# Altium PCB powerhub.PcbDoc (part 2 of 2)
Units mil, origin at the board's own origin, x right, y up, seen from the top; angles counter-clockwise.
Board outline 2155 x 2355 mil, 2 copper layers (Top Layer, Bottom Layer); 40 components, 18 nets, 144 pads, 26 vias.
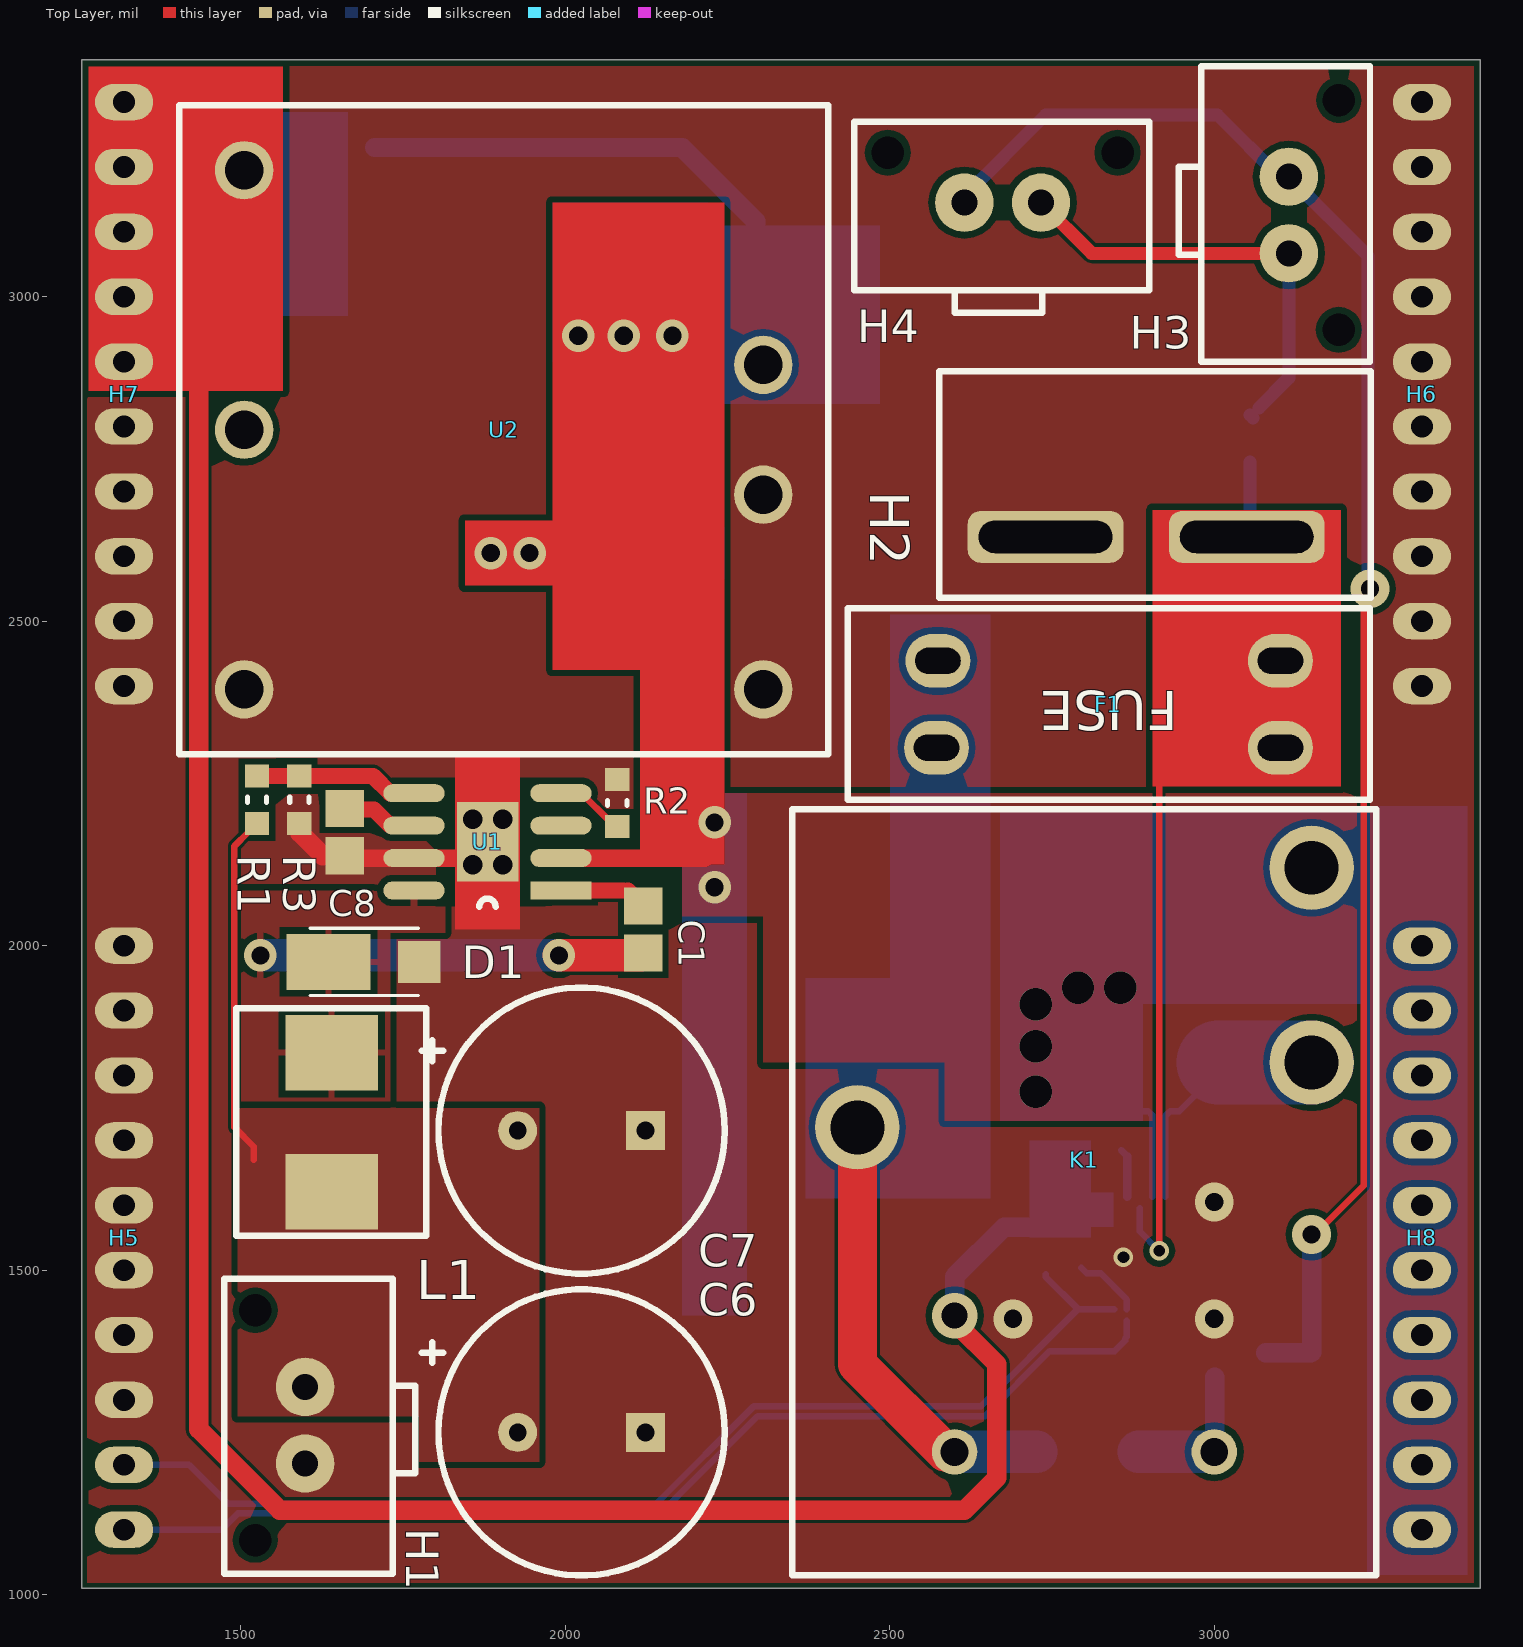
[diagram p0: Top Layer view]

## Part data (continued)
R3: "Resistor", Case/Package=0603, Case Code (Metric)=1608, Manufacturer=Vishay, Manufacturer Part Number=CRCW06034K30FKEA, Max Operating Temperature=155°C, Max Power Dissipation=100mW, Min Operating Temperature=-55°C, Package Quantity=10, Resistance=4.3K, Supplier Part Number 1=541-4.30KHCT-ND, Temperature Coefficient=100ppm/°C, Tolerance=1%, Voltage Rating=75V, Case Code (Imperial)=0603, ComponentLink1Description=https://datasheet.ciiva.com/11810/0900766b80d98afc-11810931.pdf?src-supplier=RSComponents, ComponentLink1URL=https://datasheet.ciiva.com/11810/0900766b80d98afc-11810931.pdf?src-supplier=RSComponents, ComponentLink2Description=https://datasheet.ciiva.com/2494/dcrcwe3-2494597.pdf?src-supplier=Digi-Key, ComponentLink2URL=https://datasheet.ciiva.com/2494/dcrcwe3-2494597.pdf?src-supplier=Digi-Key, ComponentLink3Description=https://datasheet.ciiva.com/9073/dcrcwe3-9073925.pdf?src-supplier=Avnet, ComponentLink3URL=https://datasheet.ciiva.com/9073/dcrcwe3-9073925.pdf?src-supplier=Avnet, ComponentLink4Description=https://datasheet.ciiva.com/16430/dcrcwe3-16430149.pdf?src-supplier=Future+Electronics, ComponentLink4URL=https://datasheet.ciiva.com/16430/dcrcwe3-16430149.pdf?src-supplier=Future+Electronics, ComponentLink5Description=https://datasheet.ciiva.com/2494/dcrcwe3-2494598.pdf?src-supplier=Digi-Key, ComponentLink5URL=https://datasheet.ciiva.com/2494/dcrcwe3-2494598.pdf?src-supplier=Digi-Key, ComponentLink6Description=https://datasheet.ciiva.com/16762/70201119-16762678.pdf?src-supplier=Allied+Electronics, ComponentLink6URL=https://datasheet.ciiva.com/16762/70201119-16762678.pdf?src-supplier=Allied+Electronics, ComponentLink7Description=https://datasheet.ciiva.com/22674/1700796-22674598.pdf?src-supplier=Element14, ComponentLink7URL=https://datasheet.ciiva.com/22674/1700796-22674598.pdf?src-supplier=Element14, ComponentLink8Description=https://datasheet.ciiva.com/22707/1697337-22707750.pdf?src-supplier=Element14, ComponentLink8URL=https://datasheet.ciiva.com/22707/1697337-22707750.pdf?src-supplier=Element14, ComponentLink9Description=https://datasheet.ciiva.com/2494/dcrcwe3-2494599.pdf?src-supplier=Digi-Key, ComponentLink9URL=https://datasheet.ciiva.com/2494/dcrcwe3-2494599.pdf?src-supplier=Digi-Key, ComponentLink10Description=https://datasheet.ciiva.com/5544/dcrcwe3-109170-5544359.pdf?src-supplier=Mouser, ComponentLink10URL=https://datasheet.ciiva.com/5544/dcrcwe3-109170-5544359.pdf?src-supplier=Mouser, ComponentLink11Description=https://datasheet.ciiva.com/22871/70201119-22871607.pdf?src-supplier=Allied+Electronics, ComponentLink11URL=https://datasheet.ciiva.com/22871/70201119-22871607.pdf?src-supplier=Allied+Electronics, ComponentLink12Description=https://datasheet.ciiva.com/7679/1697337-7679113.pdf?src-supplier=Element14, ComponentLink12URL=https://datasheet.ciiva.com/7679/1697337-7679113.pdf?src-supplier=Element14, ComponentLink13Description=https://datasheet.ciiva.com/3257/dcrcwe3-3257658.pdf?src-supplier=Avnet, ComponentLink13URL=https://datasheet.ciiva.com/3257/dcrcwe3-3257658.pdf?src-supplier=Avnet, ComponentLink14Description=https://datasheet.ciiva.com/7679/1697337-7679114.pdf?src-supplier=Element14, ComponentLink14URL=https://datasheet.ciiva.com/7679/1697337-7679114.pdf?src-supplier=Element14, ComponentLink15Description=https://datasheet.ciiva.com/26314/fld-crcw-e3-data-en-26314730.pdf?src-supplier=Distrelec, ComponentLink15URL=https://datasheet.ciiva.com/26314/fld-crcw-e3-data-en-26314730.pdf?src-supplier=Distrelec, ComponentLink16Description=https://datasheet.ciiva.com/7792/1700796-7792302.pdf?src-supplier=Element14, ComponentLink16URL=https://datasheet.ciiva.com/7792/1700796-7792302.pdf?src-supplier=Element14, Composition="Thick Film", Contact Plating=Tin, Depth=0.85mm, Features="Automotive AEC-Q200", Height=0.45mm, Lead Free="Lead Free", Length=1.55mm, Military Standard=Not, Mount="Surface Mount", Number of Pins=2, Number of Terminations=2, Packaging="Tape and Reel", Power Rating=100mW, Pricing 1="1=0.10000, 10=0.03400, 100=0.01390, 1000=0.00623, 2500=0.00540 (USD)", Radiation Hardening=No, REACH SVHC=Unknown, RoHS=Yes, Stock 1=18560, Supplier 1=Digi-Key, Termination=SMD/SMT, Voltage Rating (DC)=75V, Weight=7.1E-05oz, Width=0.033inch
R4: library part Res1, "RSENSE", Case/Package=2512, Case Code (Metric)=6432, Manufacturer=Bourns, Manufacturer Part Number=CRE2512-FZ-R001E-3, Max Operating Temperature=170°C, Max Power Dissipation=3W, Min Operating Temperature=-55°C, Resistance=1mR, Supplier Part Number 1=CRE2512-FZ-R001E-3CT-ND, Temperature Coefficient=75ppm/°C, Tolerance=1%, Case Code (Imperial)=2512, ComponentLink1Description=http://www.alliedelec.com/images/products/datasheets/bm/BOURNS/70418754.pdf?src-supplier=Allied+Electronics, ComponentLink1URL=http://www.alliedelec.com/images/products/datasheets/bm/BOURNS/70418754.pdf?src-supplier=Allied+Electronics, ComponentLink2Description=http://www.farnell.com/datasheets/2059712.pdf?src-supplier=Farnell, ComponentLink2URL=http://www.farnell.com/datasheets/2059712.pdf?src-supplier=Farnell, ComponentLink3Description=http://www.mouser.com/ds/2/54/Bourns_CRE_datasheet-369388.pdf?src-supplier=Mouser, ComponentLink3URL=http://www.mouser.com/ds/2/54/Bourns_CRE_datasheet-369388.pdf?src-supplier=Mouser, ComponentLink4Description=http://www.farnell.com/datasheets/1838634.pdf?src-supplier=Element14, ComponentLink4URL=http://www.farnell.com/datasheets/1838634.pdf?src-supplier=Element14, ComponentLink5Description=http://www.bourns.com/data/global/pdfs/CRE.pdf?src-supplier=Avnet, ComponentLink5URL=http://www.bourns.com/data/global/pdfs/CRE.pdf?src-supplier=Avnet, ComponentLink6Description=https://www.bourns.com/docs/technical-documents/featured-product-bulletins/Bourns_N1403_CRE_FPB.pdf?src-supplier=Digi-Key, ComponentLink6URL=https://www.bourns.com/docs/technical-documents/featured-product-bulletins/Bourns_N1403_CRE_FPB.pdf?src-supplier=Digi-Key, ComponentLink7Description=http://www.bourns.com/docs/Product-Datasheets/CRE.pdf?src-supplier=Digi-Key, ComponentLink7URL=http://www.bourns.com/docs/Product-Datasheets/CRE.pdf?src-supplier=Digi-Key, Composition="Metal Film,Thick Film,Metal Alloy", Contact Plating=Tin, Depth=3.35mm, Features="Moisture Resistant,Automotive AEC-Q200", Height=0.035inch, Length=6.45mm, Mount="Surface Mount", Number of Terminations=2, Packaging="Cut Tape", Power Rating=3W, Pricing 1="1=0.77000, 10=0.66800, 25=0.58680, 50=0.53640, 100=0.46550, 250=0.40480, 500=0.33598, 1000=0.27526 (USD)", REACH SVHC="No SVHC", RoHS=Yes, Stock 1=17279, Supplier 1=Digi-Key, Termination=Wraparound, Width=0.132inch
R5: library part "RES 0603", "RES 0603", Manufacturer="TE Connectivity", Manufacturer Part Number=CRGCQ0603J470K, Supplier Part Number 1=A130107CT-ND, ComponentLink1Description=https://4donline.ihs.com/images/VipMasterIC/IC/TYEL/TYEL-S-A0004929575/TYEL-S-A0004929575-1.pdf?hkey=52A5661711E402568146F3353EA87419&src-supplier=Farnell, ComponentLink1URL=https://4donline.ihs.com/images/VipMasterIC/IC/TYEL/TYEL-S-A0004929575/TYEL-S-A0004929575-1.pdf?hkey=52A5661711E402568146F3353EA87419&src-supplier=Farnell, ComponentLink2Description=https://4donline.ihs.com/images/VipMasterIC/IC/TYEL/TYEL-S-A0004929575/TYEL-S-A0004929575-1.pdf?hkey=52A5661711E402568146F3353EA87419&src-supplier=Newark, ComponentLink2URL=https://4donline.ihs.com/images/VipMasterIC/IC/TYEL/TYEL-S-A0004929575/TYEL-S-A0004929575-1.pdf?hkey=52A5661711E402568146F3353EA87419&src-supplier=Newark, Pricing 1="1=0.10000, 10=0.02100, 100=0.00860, 1000=0.00387, 2500=0.00336 (USD)", RoHS=No, Stock 1=79000, Supplier 1=Digi-Key
R6 R7: "Resistor", Case/Package=0603, Case Code (Metric)=1608, Manufacturer="TE Connectivity", Manufacturer Part Number=CRGH0603J4K7, Max Operating Temperature=125°C, Min Operating Temperature=-55°C, Number of Resistors=1, Power Rating=200mW, Resistance=4.7kR, Supplier Part Number 1=A126410CT-ND, Temperature Coefficient=100ppm/°C, Tolerance=5%, Voltage Rating=50V, Case Code (Imperial)=0603, ComponentLink1Description=https://datasheet.ciiva.com/28588/1755795-28588122.pdf?src-supplier=Element14, ComponentLink1URL=https://datasheet.ciiva.com/28588/1755795-28588122.pdf?src-supplier=Element14, Composition="Thick Film,Power resistor", Depth=0.8mm, ELV=Compliant, Height=0.45mm, Length=1.6mm, Mount="Surface Mount", Number of Terminations=2, Packaging="Tape and Reel", Pricing 1="1=0.10000, 10=0.04700, 100=0.01920, 1000=0.00861, 2500=0.00748 (USD)", REACH SVHC="No SVHC", RoHS=Yes, Stock 1=10284, Supplier 1=Digi-Key, Termination=Solder, Voltage Rating (DC)=50V, Width=0.8mm
R8: library part "RES 0603", "RES 0603", Case/Package=0603, Case Code (Metric)=1608, Manufacturer="TE Connectivity", Manufacturer Part Number=CRGCQ0603J470K, Max Operating Temperature=155°C, Max Power Dissipation=100mW, Min Operating Temperature=-55°C, Resistance=100kR, Supplier Part Number 1=A130107CT-ND, Temperature Coefficient=100ppm/°C, Tolerance=5%, Case Code (Imperial)=0603, ComponentLink1Description=https://4donline.ihs.com/images/VipMasterIC/IC/TYEL/TYEL-S-A0004929575/TYEL-S-A0004929575-1.pdf?hkey=52A5661711E402568146F3353EA87419&src-supplier=Farnell, ComponentLink1URL=https://4donline.ihs.com/images/VipMasterIC/IC/TYEL/TYEL-S-A0004929575/TYEL-S-A0004929575-1.pdf?hkey=52A5661711E402568146F3353EA87419&src-supplier=Farnell, ComponentLink2Description=https://4donline.ihs.com/images/VipMasterIC/IC/TYEL/TYEL-S-A0004929575/TYEL-S-A0004929575-1.pdf?hkey=52A5661711E402568146F3353EA87419&src-supplier=Newark, ComponentLink2URL=https://4donline.ihs.com/images/VipMasterIC/IC/TYEL/TYEL-S-A0004929575/TYEL-S-A0004929575-1.pdf?hkey=52A5661711E402568146F3353EA87419&src-supplier=Newark, ComponentLink3Description=https://www.te.com/commerce/DocumentDelivery/DDEController?Action=srchrtrv&amp;DocNm=1773204-3&amp;DocType=DS&amp;DocLang=English&src-supplier=Digi-Key, ComponentLink3URL=https://www.te.com/commerce/DocumentDelivery/DDEController?Action=srchrtrv&amp;DocNm=1773204-3&amp;DocType=DS&amp;DocLang=English&src-supplier=Digi-Key, ComponentLink4Description=https://4donline.ihs.com/images/VipMasterIC/IC/TYEL/TYEL-S-A0004929575/TYEL-S-A0004929575-1.pdf?hkey=52A5661711E402568146F3353EA87419&src-supplier=Element14, ComponentLink4URL=https://4donline.ihs.com/images/VipMasterIC/IC/TYEL/TYEL-S-A0004929575/TYEL-S-A0004929575-1.pdf?hkey=52A5661711E402568146F3353EA87419&src-supplier=Element14, Composition="Thick Film", Features="Moisture Resistant,Automotive AEC-Q200", Number of Terminations=2, Packaging="Tape and Reel", Pricing 1="1=0.10000, 10=0.02100, 100=0.00860, 1000=0.00387, 2500=0.00336 (USD)", Pricing 2="1=0.10000, 10=0.02100, 100=0.00860, 1000=0.00387, 2500=0.00336 (USD)", RoHS=No, Stock 1=79000, Stock 2=254563, Supplier 1=Digi-Key, Supplier 2=Digi-Key, Supplier Part Number 2=A130103CT-ND
U2: Manufacturer=CUI, Manufacturer Part Number=PDQE15-Q24-S3-D, Supplier Part Number 1=102-6252-ND, Pricing 1="1=19.13000, 5=18.98000, 10=18.83200, 25=18.53760, 50=17.65500, 100=16.18380, 250=15.88952, 500=15.65410 (USD)", RoHS=No, Stock 1=37, Supplier 1=Digi-Key
U3: "High-Side or Low-Side Measurement, Bidirectional Current and Power Monitor"

## Via types
v1: diameter 50, hole 28, Top Layer to Bottom Layer, 9 vias
v2: diameter 60, hole 28, Top Layer to Bottom Layer, 5 vias
v3: diameter 50, hole 50, Top Layer to Bottom Layer, 5 vias
v4: diameter 30, hole 30, Top Layer to Bottom Layer, 4 vias
v5: diameter 30, hole 18, Top Layer to Bottom Layer, 2 vias
v6: diameter 70, hole 40, Top Layer to Bottom Layer, 1 vias

## Nets (pads, with @x,y where several pads share a name; then routed paths per layer and width w, separated by ;. In a path a pad name is that pad's centre, name@x,y a point inside that pad or via, vN(x,y) a via of type N, cw(c..) or ccw(c..) an arc to the next point about the centre after c; other vN are vias at no path point)
3V3: C9.1 C14.1 C15.2 H7.6 H7.7 H7.8 H7.9 H7.10 R6.1 R7.2 U2.4 U3.6 | length 3786.6
  Top Layer w30: U2.4 1435,3125 1435,1255 1560,1130 2615,1130 2665,1180 2665,1355 2600,1420 v6(2600,1430)
  Bottom Layer w10: U2.4 U2.4@1511.57,3195
  Bottom Layer w30: v6(2600,1430) 2600,1490 2676.42,1566.42 R6.1
19V: C6.1 C7.1 H1.2 L1.2 R1.2 | length 596.6
  Top Layer w10: 1520,1670 1520,1690 1490,1720 1490,2153.58 1511.3,2174.88 1511.3,2175.87 1524.02,2188.58 R1.2 ; L1.2@1589.5,1620.5 L1.2
BAT_SCL: H5.2 R6.2 U3.5 | length 1749
  Bottom Layer w10: H5.2 1420,1200 1480,1140 2140,1140 2290,1290 2640,1290 2790,1440 ; R6.2 2740,1490 2790,1440 ; U3.5@2845.63,1440 2790,1440
BAT_SDA: H5.1 R7.1 U3.4 | length 1800.1
  Bottom Layer w10: H5.1 1470,1100 1495,1125 2146.21,1125 2296.21,1275 2646.21,1275 2746.49,1375.27 2846.64,1375.27 2862.52,1391.15 2862.52,1394.33 2865.32,1397.13 U3.4 ; R7.1@2795,1503.58 2803.58,1495 2825,1495 2865.32,1454.68 U3.4@2865.32,1440
ESD_IN: H3.2 H4.2 R5.1 | length 678.3
  Top Layer w20: H4.2 2811,3067 H3.2
  Bottom Layer w20: R5.1 R5.1@3059.6,2813.24 ; R5.1@3068.7,2828.7 3115,2875 H3.2
ESD_OUT: H3.1 H4.1 Q1.2 R8.2 | length 2618.3
  Top Layer w10: v2@3140,1565 3165,1565 3230,1630 3230,2524.65 3240,2534.65 v2(3240,2550)
  Bottom Layer w10: R8.2@3149.02,1372.4 R8.2@3150,1373.39
  Bottom Layer w20: H4.1 2615,3155 2740,3280 3005,3280 3100,3185 H3.1 3237,3063 3237,2531.65 3240,2534.65 v2(3240,2550)
  Bottom Layer w30: Q1.2 R8.2@3149.02,1372.4 ; R8.2@3150,1373.39 v2(3150,1555)
FB: R1.1 R3.2 U1.5 | length 252.8
  Top Layer w10: U1.5@1730,2235 U1.5
  Top Layer w25: R1.1 R3.2 1703.58,2261.42 U1.5@1730,2235
GND: C2.2 C3.2 C4.1 C5.1 C6.2 C7.2 C8.1 C11.1 C12.1 C13.2 C14.2 C15.1 D1.1 H1.1 H2.1 H5.3 H5.4 H5.5 H5.6 H5.7 H5.8 H5.9 H5.10 H6.1 H6.2 H6.3 H6.4 H6.5 H6.6 H6.7 H6.8 H6.9 H6.10 H7.1 H7.2 H7.3 H7.4 H7.5 Q1.3 R2.1 R3.1 R8.1 U1.7 U2.1 U2.2 U2.6 U3.1 U3.2 U3.7 | length 406.7
  Top Layer w10: R3.1 1590.98,2188.58 R3.1@1590.98,2174.02 ; C8.1 C8.1@1663.58,2135 ; U1.7@1855,2135 U1.7@1880,2160
  Top Layer w27: C8.1@1663.58,2135 1766.81,2135 U1.7@1855,2135
  Top Layer w30: R3.1@1590.98,2174.02 1626.42,2138.58 C8.1
  Bottom Layer w10: C15.1@2856.42,1685 C15.1@2865.63,1675.79
  Bottom Layer w13: U3.7@2865.63,1613.23 C15.1@2865.63,1675.79
  other v2: 2690,1425 3000,1425 3000,1605
  other v4: 1857.19,2125 1903.19,2125 1857.19,2195 1903.19,2195
  other v5: 2860,1520
IN+: K1.2 R4.2 U3.10 | length 392.3
  Bottom Layer w10: U3.10@2924.37,1613.23 2924.37,1737.37 2931.86,1744.86 2946,1744.86 3002,1800.86 R4.2 R4.2@3007,1820
  Bottom Layer w130: R4.2@3007,1820 K1.2
Net_1: C1.2 U1.1 | length 136.6
  Top Layer w10: 2089.61,2085 2089.65,2084.96 C1.2@2096.46,2084.96
  Top Layer w25: U1.1 2089.61,2085 ; C1.2@2096.46,2084.96 C1.2
Net_4: R2.2 U1.4 | length 103.8
  Top Layer w10: U1.4 2025,2235 2068.82,2191.18 R2.2@2078.82,2191.18
Net_6: C8.2 U1.6 | length 117.8
  Top Layer w10: C8.2 C8.2@1661.42,2210 ; U1.6@1730,2185 U1.6
  Top Layer w25: C8.2@1661.42,2210 1705,2210 U1.6@1730,2185
Net_8: C1.1 D1.2 L1.1 U1.8 | length 591.5
  Top Layer w50: v1(1990,1985) 2116.42,1985 C1.1
  Bottom Layer w10: v1(1530,1985) v1@1535.82,1985
  Bottom Layer w50: v1@1535.82,1985 v1(1990,1985)
NetC9_2: C9.2 C12.2 L2.2 U2.3 | length 733.9
  Bottom Layer w10: L2.2@2283.74,3040.91 L2.2@2293.29,3050.45 ; U2.3 U2.3@2305,2908.11 ; 2440,2870 2440.12,2869.88
  Bottom Layer w30: C9.2 2180,3230 2293.29,3116.71 L2.2@2293.29,3050.45 ; U2.3 U2.3@2310,2900
NetD2_1: D2.1 K1.4 Q1.1 | length 231.5
  Bottom Layer w10: K1.4 K1.4@3000.63,1220.63
  Bottom Layer w30: K1.4@3000.63,1220.63 Q1.1
  Bottom Layer w65: D2.1 K1.4
NetD2_2: D2.2 F1.2 K1.1 K1.3 | length 700
  Top Layer w60: K1.1 2450,1355 2585,1220 K1.3
  Bottom Layer w10: F1.2@2572,2330 F1.2@2574,2332
  Bottom Layer w65: K1.3 D2.2
VBAT: C2.1 C3.1 C4.2 C5.2 C11.2 C13.1 H8.1 H8.2 H8.3 H8.4 H8.5 H8.6 H8.7 H8.8 H8.9 H8.10 K1.5 L2.1 R4.1 U1.2 U3.9 | length 608.2
  Top Layer w27: U1.2 2215,2135
  Bottom Layer w10: 2205.12,2214.88 v1(2230,2190) ; 2214.88,2125.12 2220,2120 ; 2224.88,2139.88 2230,2145 ; R4.1 2828,1800.86 2884,1744.86 2898.14,1744.86 2904.68,1738.32 U3.9@2904.68,1613.23
  Bottom Layer w30: C3.1 2224.88,2139.88
  other v1: 2230,2090 1885,2605 1945,2605 2020,2940 2090,2940 2165,2940
  other v3: 2725,1775 2725,1845 2725,1910 2790,1935 2855,1935
VBAT_IN: F1.1 H2.2 R5.2 U3.8 | length 1083.9
  Top Layer w10: v5(2915,1530) 2915,2300 2940,2325 3017,2325
  Bottom Layer w10: U3.8 2885,1560 v5(2915,1530) ; H2.2 H2.2@3055,2635 ; F1.1@3113.58,2325 F1.1@3118.58,2320
  Bottom Layer w20: H2.2@3055,2635 R5.2
pads on no net: H1.0 H3.0 H4.0 U1.3 U2.5 U3.3

## Polygon pours and split planes (outlines as drawn)
GND on Top Layer "Top Layer-No Net 3" (solid, remove dead copper, pour order 18): 1260,3355 3400,3355 3400,1015 1260,1015
Net_8 on Top Layer "Top Layer-No Net" (solid, pour order 8): 1730,1760 1730,2020 1815,2020 1815,2100 1705,2100 1705,2085 1495,2085 1495,1760
GND on Top Layer "GND_HEAT" (solid, pour order 2): 2250,1680 2250,2025 2170,2025 2170,1945 1950,1945 1950,2060 1930,2060 1930,2330 1830,2330 1830,2010 1740,2010 1740,1760 1885,1760 1970,1760 1970,1180 2250,1180
VBAT on Top Layer "Top Layer-No Net 1" (solid, pour order 14): 2180,2235 2180,2045 2305,2045 2305,1820 2585,1820 2585,1730 2905,1730 2905,2235
19V on Top Layer "Top Layer-No Net 2" (solid, pour order 10): 1495,1750 1495,1275 1775,1275 1775,1205 1960,1205 1960,1750
GND on Bottom Layer "Bottom Layer-No Net" (solid, remove dead copper, pour order 16): 1265,3355 3390,3355 3390,1015 1265,1015

## Other copper
Top Layer:
  rectangle net GND: 1830,2025 1930,2295
  rectangle net VBAT_IN: 2905,2245 3195,2671.4
  rectangle net 3V3: 1265,2855 1565,3355
  rectangle net VBAT: 1845,2555 2020,2655
  rectangle net VBAT: 1980,2425 2245,3145
  rectangle net VBAT: 2115,2125 2245,3110
  pour cut-out: 1800.28,2259.25 1959.72,2259.25 1959.72,2060.28 1960,2060 1800,2060
  pour cut-out: 1740,2275
Bottom Layer:
  rectangle net VBAT: 3235,1030 3390,2215
  rectangle net VBAT: 2670,1910 3390,2215
  rectangle net VBAT: 2670,1730 2890,2000
  rectangle net NetD2_2: 2370,1610 2655,1950
  rectangle net VBAT: 1849.7,2565 2245,2645
  rectangle net VBAT: 1980,2900 2220,3145
  rectangle net 3V3: 1415,2970 1665,3285
  rectangle net NetC9_2: 2240,2835 2485,3110
  rectangle net NetD2_2: 2500,1610 2655,2510
  region net VBAT: 2280,2235 2180,2235 2180,1430 2280,1430
  rectangle net 3V3: 2795,1566.42 2845,1620
  rectangle net 3V3: 2715,1550 2810,1700
  pour cut-out: 2810,1725 2810,1625 2900,1625 2900,1725
  pour cut-out: 2817.13,1719.8

## Silkscreen, mask and mechanical layers (free items; w line width, h text height)
Mechanical 1:
  lines w10: 1255,1015 3405,1015 3405,3360 1255,3360 1255,1015

## Dimensions
3405,1015 to 3405,3360 on Mechanical 1
1255,3360 to 3405,3360 on Mechanical 1

## Text inside footprints (layer, text, board x,y; h text height)
F1: Top Overlay "FUSE" at 2944,2392 h60 r180